# Altium PCB display.PcbDoc
Units mm, origin at the board's own origin, x right, y up, seen from the top; angles counter-clockwise.
Board outline 29.7 x 24.35 mm, 2 copper layers (Top Layer, Bottom Layer); 22 components, 18 nets, 78 pads, 14 vias.
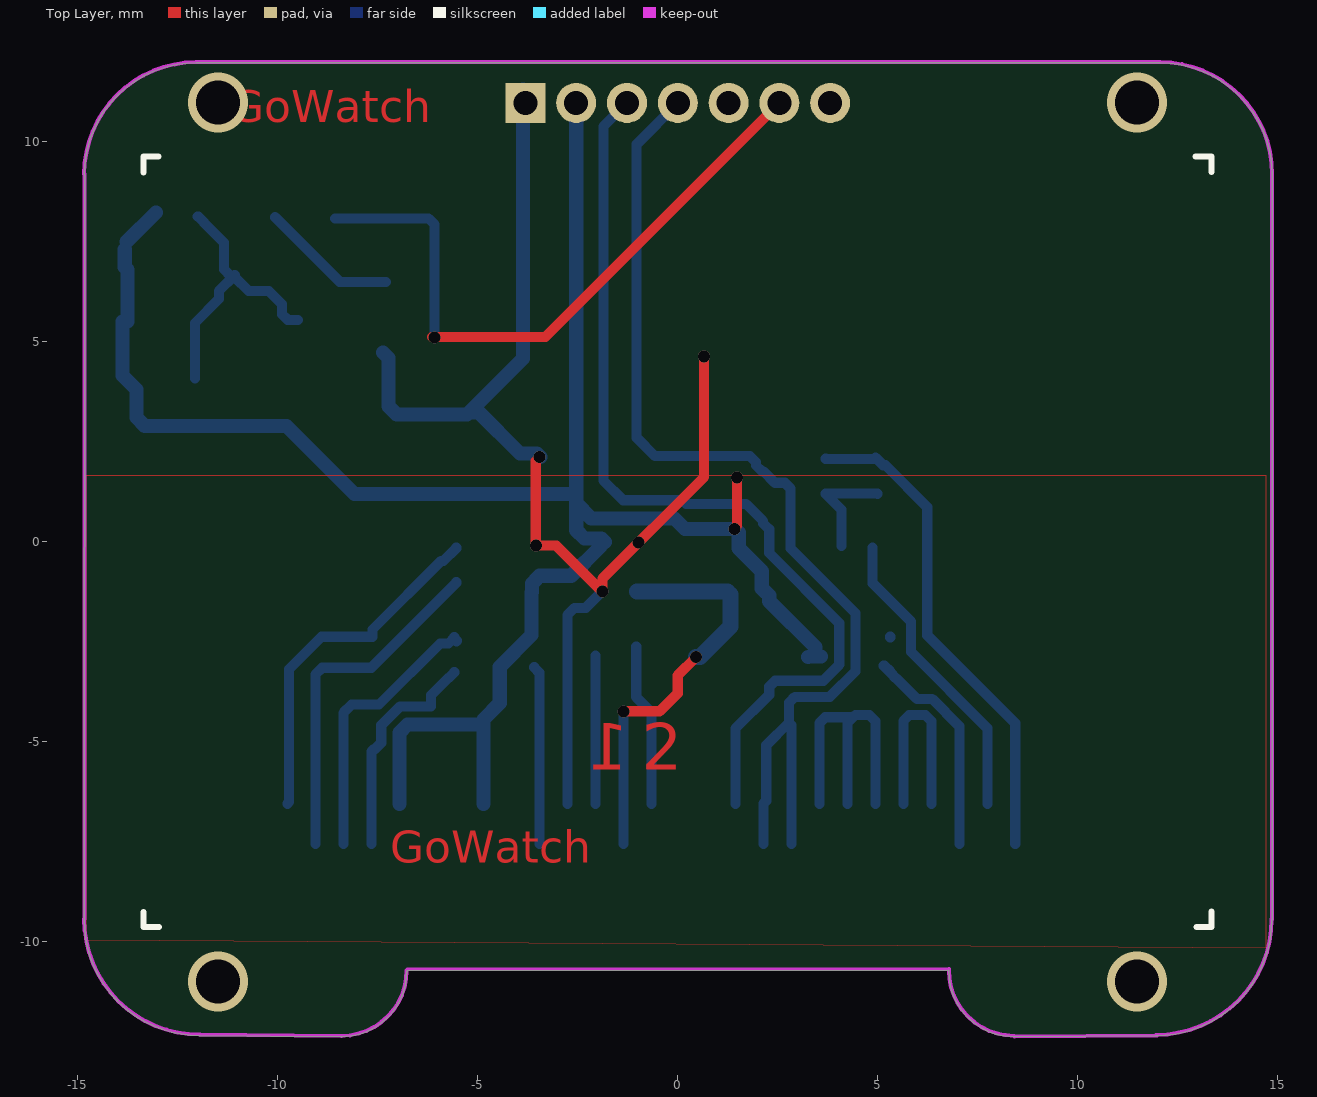
[diagram p0: Top Layer view]
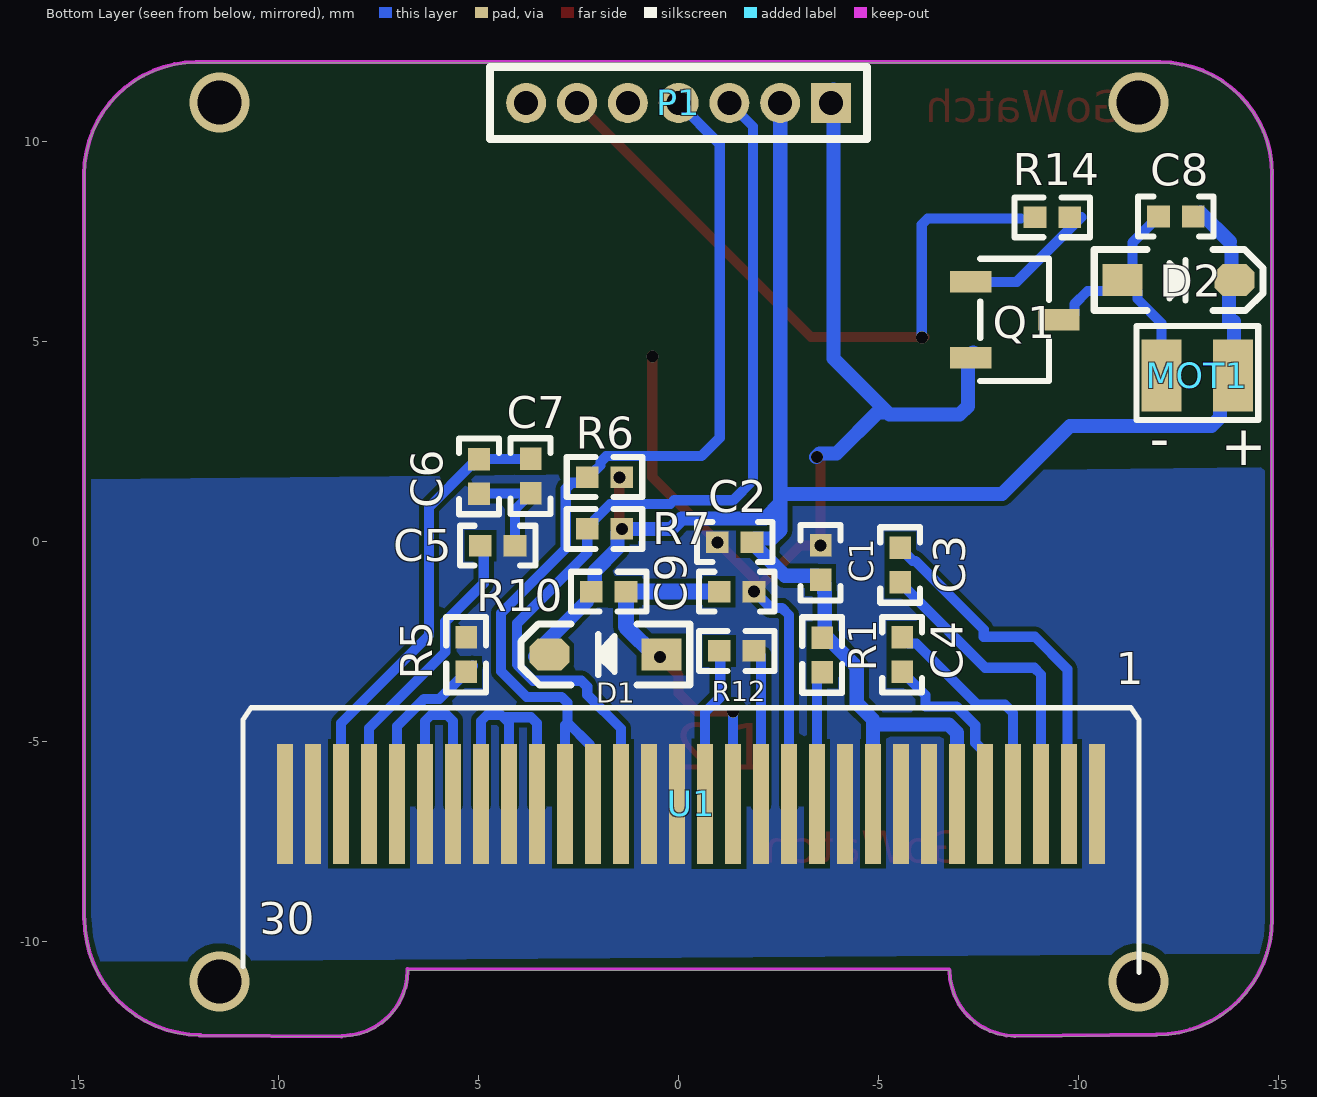
[diagram p1: Bottom Layer view, seen from below]

## Layer stack, top to bottom
Top Solder: solder mask 0.0102, Solder Resist, Dk 3.5
Top Layer: signal copper 0.0356
Dielectric 1: dielectric 0.32, FR-4, Dk 4.8
Bottom Layer: signal copper 0.0356
Bottom Solder: solder mask 0.0102, Solder Resist, Dk 3.5

## Board outline
-14.831,-9.448 ccw(c-11.937,-9.448) -11.937,-12.343 -11.953,-12.343 -8.392,-12.37 -8.402,-12.37 ccw(c-8.402,-10.735) -6.767,-10.735 -6.746,-10.717 6.786,-10.704 6.785,-10.735 ccw(c8.42,-10.735) 8.42,-12.37 8.43,-12.373 11.99,-12.346 11.963,-12.346 ccw(c11.963,-9.452) 14.858,-9.452 14.87,-9.447 14.87,9.173 14.869,9.173 ccw(c12.069,9.173) 12.069,11.973 12.065,11.972 -12.021,11.972 -12.031,11.972 ccw(c-12.031,9.172) -14.831,9.172 -14.821,9.172

## Design rules (kind name [scope] priority, off if disabled: settings)
Clearance [All] p1: gap=0.127 ignorepadtopadclearanceinfootprint=FALSE except(0.15: Arc-Arc Arc-Track Track-Track; 0.2: Arc-Via Track-Via SMDPad-Via THPad-Via Via-Fill Via-Poly Via-Region; 0.4: Via-Via)
ComponentClearance [All] p1: gap=0.127 collisioncheckmode=3 verticalgap=0.127 showdistances=FALSE
MinimumSolderMaskSliver [All] p1: minsoldermaskwidth=0.22
PolygonConnect [All] p1: connectstyle=Direct reliefconductorwidth=0.254 reliefentries=4 polygonreliefangle="90 Angle" airgapwidth=0.254
RoutingVias [All] p1: holewidth=0.711 width=1.27 viastyle="Through Hole" minholewidth=0.711 minwidth=1.27 maxholewidth=0.711 maxwidth=1.27
SolderMaskExpansion [All] p1: expansion=0.102 istentingtop=FALSE
Width [All] p1: maxlimit=3 minlimit=0.127 preferedwidth=0.254 minimp=50.000000 maximp=50.000000 favimp=50.000000
28 further rules are at their usual default settings.

## Components (designator, comment, footprint, x,y, rotation, side; value= is the part's Value field where it differs from the comment)
C1 "105" C0402-min -3.54,-0.467 r270 bottom
C2 "225" C0402-min -1.34,-0.007 r180 bottom
C3 "105" C0402-min -5.53,-0.527 r270 bottom
C4 "105" C0402-min -5.58,-2.767 r270 bottom
C5 "225" C0402-min 4.48,-0.097 r0 bottom
C6 "225" C0402-min 5,1.583 r90 bottom
C7 "105" C0402-min 3.71,1.593 r90 bottom
C8 "104" C0402-min -12.37,8.133 r180 bottom
C9 "106" C0402-min -1.39,-1.247 r180 bottom
D1 "1N4148" SOD-323 1.84,-2.817 r0 bottom
D2 "1N4148" SOD-323 -12.49,6.543 r180 bottom
MOT1 "LCM1027A2445F" VIBRATION_MOTOR0820 -12.83,4.543 r180 bottom
P1 "MHDR1X7" MHDR1X7 -3.8,10.973 r0 bottom
Q1 "S8050" SOT-23-3 -8.36,5.713 r0 bottom
R1 "4.7K" R0402 -3.58,-2.777 r270 bottom
R5 "560K" R0402 5.32,-2.767 r270 bottom
R6 "4.7K" R0402 1.81,1.618 r0 bottom
R7 "4.7K" R0402 1.81,0.323 r0 bottom
R10 "4.7K" R0402 1.81,-1.247 r180 bottom
R12 "4.7K" R0402 -1.39,-2.727 r180 bottom
R14 "1K" R0402 -9.28,8.113 r180 bottom
U1 "1.3寸OLED，FPC线30pin" 0.96OLED -16.801,-5.648 r0 top

## Footprints (in the part's own frame and the unit in brackets; to place one, negate y for a bottom-side part, rotate by r counter-clockwise, add the part's x,y. Pads: shape width x height; smd on the part's side, far side on the other; paste and mask are expansions set on the pad)
0.96OLED [mm]
  rect 0.4x3 smd far side: 1(6.35,-0.9) 2(7.05,-0.9) 3(7.75,-0.9) 4(8.45,-0.9) 5(9.15,-0.9) 6(9.85,-0.9) 7(10.55,-0.9) 8(11.25,-0.9) 9(11.95,-0.9) 10(12.65,-0.9) 11(13.35,-0.9) 12(14.05,-0.9) 13(14.75,-0.9) 14(15.45,-0.9) 15(16.15,-0.9) 16(16.85,-0.9) 17(17.55,-0.9) 18(18.25,-0.9) 19(18.95,-0.9) 20(19.65,-0.9) 21(20.35,-0.9) 22(21.05,-0.9) 23(21.75,-0.9) 24(22.45,-0.9) 25(23.15,-0.9) 26(23.85,-0.9) 27(24.55,-0.9) 28(25.25,-0.9) 29(25.95,-0.9) 30(26.65,-0.9)
C0402-min [mm]
  rect 0.566x0.54 smd paste-100 mask+0.051: 1(-0.381,0) 2(0.485,0)
  silkscreen extent -0.89,-0.5 1,0.5
MHDR1X7 [mm]
  rect 1x1 hole 0.6: 1(0,0)
  round 1 hole 0.6: 2(1.27,0) 3(2.54,0) 4(3.81,0) 5(5.08,0) 6(6.35,0) 7(7.62,0)
  silkscreen extent -0.9,-0.9 8.52,0.9
R0402 [mm]
  rect 0.566x0.54 smd paste-100 mask+0.051: 1(-0.381,0) 2(0.485,0)
  silkscreen extent -0.89,-0.5 1,0.5
SOD-323 [mm] "1N4148"
  rect 1x0.8 smd: 1(-1.4,0)
  oct 1x0.8 smd: 2(1.4,0)
  silkscreen extent -2.11,-0.76 2.11,0.76, body extent -1.34,-0.63 1.31,0.67, height 1
SOT-23-3 [mm] "CJ2301 P-MOS, S8050 三极管"
  rect 1.037x0.532 smd: 1(1.07,-0.787) 2(1.07,1.113) 3(-1.132,0.163)
  silkscreen extent -0.89,-1.36 0.83,1.69
VIBRATION_MOTOR0820 [mil]
  rect 39.37x70.87 smd: 1(-30,-15) 2(40,-15)
  silkscreen extent -55,-59 65,34

## Part data
C1 C2 C3 C4 C5 C6 C7 C8 C9: library part C, "无极性贴片电容", BOM名称=无极性贴片电容, 学习资源=www.ooocke.com, 材质=X7R, 版权归属=源创客
D1 D2: "高速开关二极管", BOM名称=高速开关二极管, 学习资源=www.ooocke.com, 版权归属=源创客
MOT1: library part Vibration_Motor, JLCPCB Part Class="Extended Part", LCSC Part Name="扁平1027 振动马达", Manufacturer=LEADER(立得), Operating Temperature=-20℃~+60℃, Rated Current=80mA, Rated Voltage=3V, Add into BOM=yes, Convert to PCB=yes, Datasheet=https://atta.szlcsc.com/upload/public/pdf/source/20210326/C2759984_5008EC97BD438BDFB6866D31635439F4.pdf, Device=LCM1027A2445F, Manufacturer Part=LCM1027A2445F, Rated Speed=10000rpm, Sense Of Rotation=CW；CCW, Supplier=LCSC, Supplier Footprint=-, Supplier Part=C2759984, Symbol=LCM1027A2445F, Type=扁平振动马达
P1: "Header, 7-Pin", LatestRevisionDate=17-Jul-2002, LatestRevisionNote="Re-released for DXP Platform.", Publisher="Altium Limited"
Q1: Collector - Emitter Voltage VCEO=25V, Current - Collector Cutoff=100nA, Current - Collector(Ic)=500mA, DC Current Gain=120@50mA,1.0V, JLCPCB Part Class="Extended Part", LCSC Part Name="hFE:200-350，丝印:J3Y S8050", Manufacturer=宏嘉诚, Operating Temperature=-55℃~+150℃, Pd - Power Dissipation=300mW, Transition frequency(fT)=100MHz, Add into BOM=yes, Convert to PCB=yes, Datasheet=https://atta.szlcsc.com/upload/public/pdf/source/20250107/343E8B94B5C24D0D65D7D4B70E0B73F6.pdf, Device=S8050_C20069125, Manufacturer Part=S8050, Supplier=LCSC, Supplier Footprint=SOT-23, Supplier Part=C20069125, Symbol=S8050_C20069125, Type=NPN, Vce Saturation(VCE(sat))=600mV
R1 R5 R6 R7 R10 R12 R14: library part R, "贴片电阻", BOM名称=贴片电阻, 学习资源=www.ooocke.com, 版权归属=源创客

## Via types
v1: diameter 0.3, hole 0.3, Top Layer to Bottom Layer, 10 vias
v2: diameter 1.5, hole 1.1, Top Layer to Bottom Layer, 4 vias

## Nets (pads, with @x,y where several pads share a name; then routed paths per layer and width w, separated by ;. In a path a pad name is that pad's centre, name@x,y a point inside that pad or via, vN(x,y) a via of type N, cw(c..) or ccw(c..) an arc to the next point about the centre after c; other vN are vias at no path point)
+3.3V: C1.2 C2.2 C8.2 D1.2 D2.2 MOT1.2 P1.2 R1.1 R6.1 R7.1 R10.1 U1.6 U1.9 | length 50.7
  Top Layer w0.254: v1(1.429,0.323) 1.429,0.335 1.492,0.398 v1(1.492,1.614)
  Bottom Layer w0.354: -13.876,5.512 -13.876,4.162 -13.523,3.809 -13.523,3.106 -13.316,2.899 -9.774,2.899 -8.076,1.2 -6.126,1.2 -2.53,1.2 ; -13.812,7.308 -13.816,7.305 -13.816,6.871 -13.749,6.804 -13.749,5.512 ; -13.77,7.503 C8.2@-13.035,8.238 ; U1.6 -6.951,-4.774 -6.744,-4.567 -4.919,-4.567 -4.851,-4.499 ; U1.9 -4.851,-4.499 ; P1.2 -2.53,1.2 ; D1.2@3.27,-2.877 D1.2@3.593,-2.867 ; D1.2@3.45,-2.637 2.297,-1.484 2.297,-1.34 2.204,-1.247 R10.1 2.108,-1.164 2.108,-0.735 1.535,-0.162 1.535,0.23 1.442,0.323 v1(1.429,0.323) 0.193,0.323 -0.07,0.586 -2.153,0.586 -2.53,0.963 ; -4.851,-4.499 -4.851,-4.438 -4.443,-4.03 -4.443,-3.126 -3.646,-2.329 -3.646,-1.265 -3.633,-1.252 -3.633,-1.045 C1.2 -3.54,-0.939 -3.447,-0.846 -2.653,-0.846 -1.92,-0.113 -1.92,-0.1 -1.827,-0.007 C2.2 -1.815,-0.007 -1.902,0.081 -2.323,0.081 -2.53,0.288 -2.53,0.963 ; -2.53,0.963 -2.53,1.2
GND: C1.1 C2.1 C5.1 C6.1 C7.1 C9.2 P1.1 Q1.2 R5.1 R12.2 U1.1 U1.7 U1.8 U1.10 U1.12 U1.13 U1.16 U1.17 U1.21 U1.22 U1.23 U1.24 U1.25 U1.29 U1.30 | length 51.3
  Top Layer w0.254: v1(-3.449,2.125) -3.449,2.113 -3.54,2.022 v1(-3.54,-0.086) -3.531,-0.095 -3.027,-0.095 v1(-1.875,-1.247) -1.875,-0.923 0.668,1.62 v1(0.668,4.639)
  Bottom Layer w0.254: -5.26,3.183 -4.96,3.183 -5.11,3.333 -5.145,3.368 ; U1.12 -2.751,-1.831 -2.571,-1.651 -2.292,-1.651 C9.2@-1.928,-1.287 ; U1.13 R12.2@-2.051,-2.843 ; v1(-1.875,-1.247) C9.2@-1.887,-1.247 ; U1.21 3.549,-4.536 3.698,-4.387 4.307,-4.387 4.349,-4.429 ; C5.1 4.099,0.81 3.71,1.199 C7.1 3.715,1.207 4.995,1.207 C6.1 ; U1.22 4.249,-4.529 4.349,-4.429 ; U1.23 4.949,-4.478 4.8,-4.329 4.449,-4.329 4.349,-4.429 ; R5.1 R5.1@5.32,-2.373 ; U1.24 5.649,-4.478 5.798,-4.329 6.2,-4.329 6.349,-4.478 U1.25 ; C9.2@-1.928,-1.287 -1.928,-1.247 C9.2@-1.887,-1.247 ; C9.2@-1.928,-1.287 C9.2@-1.887,-1.247
  Bottom Layer w0.354: Q1.2@-7.357,4.733 -7.224,4.6 -7.224,3.39 -7.017,3.183 -5.26,3.183 -5.11,3.333 -3.86,4.583 P1.1@-3.86,11.311 ; -4.98,3.253 -3.938,2.211 -3.517,2.211 v1@-3.43,2.124
  other v1: -0.967,-0.018
LNA_IN: P1.5
NetC3_1: C3.1 U1.2 | length 8.9
  Bottom Layer w0.254: U1.2 -9.71,-6.507 -9.71,-3.183 -8.899,-2.372 -7.621,-2.372 -7.621,-2.191 -5.905,-0.475 -5.846,-0.475 -5.53,-0.159 C3.1
NetC3_2: C3.2 U1.3 | length 8.7
  Bottom Layer w0.254: U1.3@-9.051,-7.548 U1.3 -9.051,-3.316 -8.882,-3.147 -7.653,-3.147 -5.53,-1.024 C3.2
NetC4_1: C4.1 U1.4 | length 6.9
  Bottom Layer w0.254: U1.4@-8.351,-7.548 U1.4 -8.351,-4.276 -8.143,-4.068 -7.458,-4.068 -5.932,-2.542 -5.723,-2.542 -5.58,-2.399 C4.1 ; C4.1@-5.522,-2.488 C4.1@-5.506,-2.472
NetC4_2: C4.2 U1.5 | length 5.6
  Bottom Layer w0.254: U1.5@-7.651,-7.548 U1.5 -7.651,-5.248 -7.578,-5.175 -7.554,-5.175 -7.405,-5.026 -7.405,-4.586 -6.932,-4.113 -6.161,-4.113 -6.161,-3.833 -5.736,-3.407 -5.723,-3.407 -5.58,-3.264 C4.2
NetC5_2: C5.2 U1.27 | length 7.6
  Bottom Layer w0.254: C5.2@4.88,-0.146 4.88,-1.034 5.844,-1.998 5.844,-2.752 7.749,-4.657 U1.27
NetC6_2: C6.2 C7.2 U1.28 | length 12.4
  Bottom Layer w0.254: C7.2 3.715,2.073 4.982,2.073 4.995,2.073 C6.2
  Bottom Layer w0.256: C6.2@4.955,2.1 4.982,2.073 5.142,1.913 5.203,1.913 6.249,0.867 6.249,-2.336 8.449,-4.536 U1.28 U1.28@8.449,-7.548
NetC8_1: C8.1 D2.1 MOT1.1 Q1.3 | length 7
  Bottom Layer w0.254: MOT1.1@-12.06,4.085 -12.06,5.473 -11.463,6.07 -11.463,6.27 -11.065,6.668 -11.065,6.618 -10.717,6.27 -10.212,6.27 -9.884,5.942 -9.884,5.689 -9.745,5.55 Q1.3 ; C8.1 -11.976,8.133 -11.833,7.99 -11.833,7.977 -11.335,7.479 -11.335,6.816 D2.1@-11.187,6.668
NetC9_1: C9.1 D1.1 R10.2 U1.14 | length 10.3
  Top Layer w0.254: v1(-1.35,-4.237) -0.444,-4.237 0.008,-3.784 0.008,-3.339 v1(0.47,-2.877)
  Bottom Layer w0.254: U1.14@-1.351,-7.548 U1.14 ; U1.14 v1@-1.351,-4.238
  Bottom Layer w0.4: C9.1 R10.2@1.24,-1.247 ; v1(0.47,-2.877) 0.57,-2.877 1.325,-2.122 1.325,-1.317 1.255,-1.247 R10.2@1.243,-1.247
NetQ1_1: Q1.1 R14.2 | length 3.4
  Bottom Layer w0.254: -10.057,8.113 -8.444,6.5 Q1.1
NetR1_2: R1.2 U1.11 | length 4.5
  Bottom Layer w0.254: R1.2@-3.58,-3.142 -3.451,-3.271 U1.11 U1.11@-3.451,-7.548 ; R1.2@-3.58,-3.129 R1.2@-3.576,-3.133
NetR5_2: R5.2 U1.26 | length 5.8
  Bottom Layer w0.254: R5.2@5.394,-3.333 R5.2@5.32,-3.259 ; U1.26@7.049,-7.548 U1.26 7.049,-4.606 6.368,-3.925 5.986,-3.925 5.469,-3.407 5.463,-3.407 5.32,-3.264 R5.2@5.32,-3.259 ; R5.2@5.32,-3.259 R5.2 5.32,-3.239 5.177,-3.096 5.157,-3.096 R5.2@5.32,-3.259
NetR12_1: R12.1 U1.15 | length 4.1
  Bottom Layer w0.254: R12.1@-1.03,-2.618 -1.03,-3.882 -0.651,-4.261 U1.15
SCL: P1.3 R7.2 U1.18 | length 23.7
  Bottom Layer w0.254: P1.3 -1.85,10.383 -1.85,1.533 -1.357,1.04 0.118,1.04 0.214,0.945 1.719,0.945 2.139,0.525 2.139,0.466 R7.2@2.282,0.323 ; U1.18 1.449,-4.667 2.295,-3.821 2.295,-3.62 2.443,-3.471 3.645,-3.471 4.047,-3.069 4.047,-2.032 2.295,-0.28 R7.2
SDA: P1.4 R6.2 U1.19 U1.20 | length 27.2
  Bottom Layer w0.254: P1.4 -1.02,9.943 -1.02,2.603 -0.559,2.142 1.817,2.142 1.966,1.994 1.966,1.91 2.115,1.761 2.152,1.761 2.438,1.475 2.683,1.475 2.831,1.327 2.831,-0.166 4.451,-1.786 4.451,-3.237 3.813,-3.875 2.938,-3.875 2.789,-4.024 2.789,-4.518 2.222,-5.085 2.222,-6.475 U1.19 U1.19@2.149,-7.548 ; U1.20@2.849,-7.548 U1.20 2.849,-4.578
VIB_PWM: P1.6 R14.1 | length 16.5
  Top Layer w0.254: v1@-6.13,5.123 -3.3,5.123 P1.6
  Bottom Layer w0.254: -8.553,8.083 -6.219,8.083 -6.07,7.934 v1(-6.07,5.103)
pads on no net: P1.7
copper on no net: | length 0.1
  Top Layer w0.254: 3.778,10.931 3.82,10.973
  other v2: -11.49,-10.987 11.49,-10.987 -11.49,10.987 11.49,10.987

## Polygon pours and split planes (outlines as drawn)
GND on Top Layer "GND_L01_P002" (solid, remove dead copper, pour order 2): -14.784,1.663 14.71,1.663 14.71,-10.165 -14.784,-9.959
GND on Bottom Layer "GND_L02_P000" (solid, remove dead copper, pour order 0): -14.76,1.863 14.858,1.563 14.733,-10.5 -14.76,-10.294

## Keep-outs
Keep-Out Layer:
  lines w0.1: -14.83,-9.428 ccw(c-11.935,-9.428) -11.935,-12.322 ; -14.83,9.193 cw(c-12.03,9.193) -12.03,11.993 ; -14.82,-9.428 -14.82,9.193 ; -12.02,11.993 12.066,11.993 ; -11.951,-12.323 -8.391,-12.35 ; -8.401,-12.349 ccw(c-8.401,-10.714) -6.766,-10.714 ; -6.745,-10.696 6.787,-10.684 ; 6.786,-10.714 ccw(c8.421,-10.714) 8.421,-12.349 ; 8.431,-12.362 11.992,-12.335 ; 11.964,-12.326 ccw(c11.964,-9.431) 14.859,-9.431 ; 12.07,11.994 cw(c12.07,9.194) 14.87,9.194 ; 14.871,-9.436 14.871,9.183

## Other copper
Top Layer:
  text "GoWatch" at -11.177,10.49 h0.8
  text "1" at -1.23,-6.08 h2
  text "2" at -0.891,-6.087 h2
  text "GoWatch" at -7.175,-8.02 h0.8

## Silkscreen, mask and mechanical layers (free items; w line width, h text height)
Top Overlay:
  lines w0.154: -13.35,-9.25 -13.35,-9.63 -12.96,-9.63 ; -13.35,9.24 -13.35,9.63 -12.97,9.63 ; 12.96,9.63 13.35,9.63 13.35,9.25 ; 12.977,-9.63 13.357,-9.63 13.357,-9.24
Bottom Overlay:
  text "1" at -10.92,-3.557 h0.8
Top Paste:
  lines w0.154: -13.35,-9.63 13.35,-9.63 13.35,9.63 -13.35,9.63 -13.35,-9.63
  lines w0.254: -14.781,-8.558 14.8,-8.558 ; 0.009,-8.558 0.009,11.972
Top Solder:
  text "GoWatch" at -10.939,10.53 h0.8
  text "1" at -1.211,-6.087 h2
  text "2" at -0.85,-6.1 h2
  text "GoWatch" at -7.155,-8.02 h0.8
  text "Life" at 5.663,-11.737 h0.8
Mechanical 1:
  lines w0.1: -14.831,-9.448 ccw(c-11.937,-9.448) -11.937,-12.343 ; -14.831,9.172 cw(c-12.031,9.172) -12.031,11.972 ; -14.821,-9.449 -14.821,9.172 ; -12.021,11.972 12.065,11.972 12.079,11.973 ; -11.953,-12.343 -8.392,-12.37 ; -8.402,-12.37 ccw(c-8.402,-10.735) -6.767,-10.735 ; -6.746,-10.717 6.786,-10.704 ; 6.785,-10.735 ccw(c8.42,-10.735) 8.42,-12.37 ; 8.43,-12.383 11.99,-12.356 ; 11.963,-12.346 ccw(c11.963,-9.452) 14.858,-9.452 ; 12.069,11.973 cw(c12.069,9.173) 14.869,9.173 ; 14.87,-9.457 14.87,9.163

## Text inside footprints (layer, text, board x,y; h text height)
MOT1: Bottom Overlay "+" at -13.541,1.913 h1; Bottom Overlay "-" at -11.763,2.087 h1
U1: Bottom Overlay "30" at 10.5,-9.007 h0.8 r180